# Altium PCB APC_Sensor.PcbDoc
Units mm, origin at the board's own origin, x right, y up, seen from the top; angles counter-clockwise.
Board outline 152.4 x 101.6 mm, 2 copper layers (Top Layer, Bottom Layer); 9 components, 6 nets, 18 pads, 49 vias.
Unrouted connection lines stored in the file: 7.
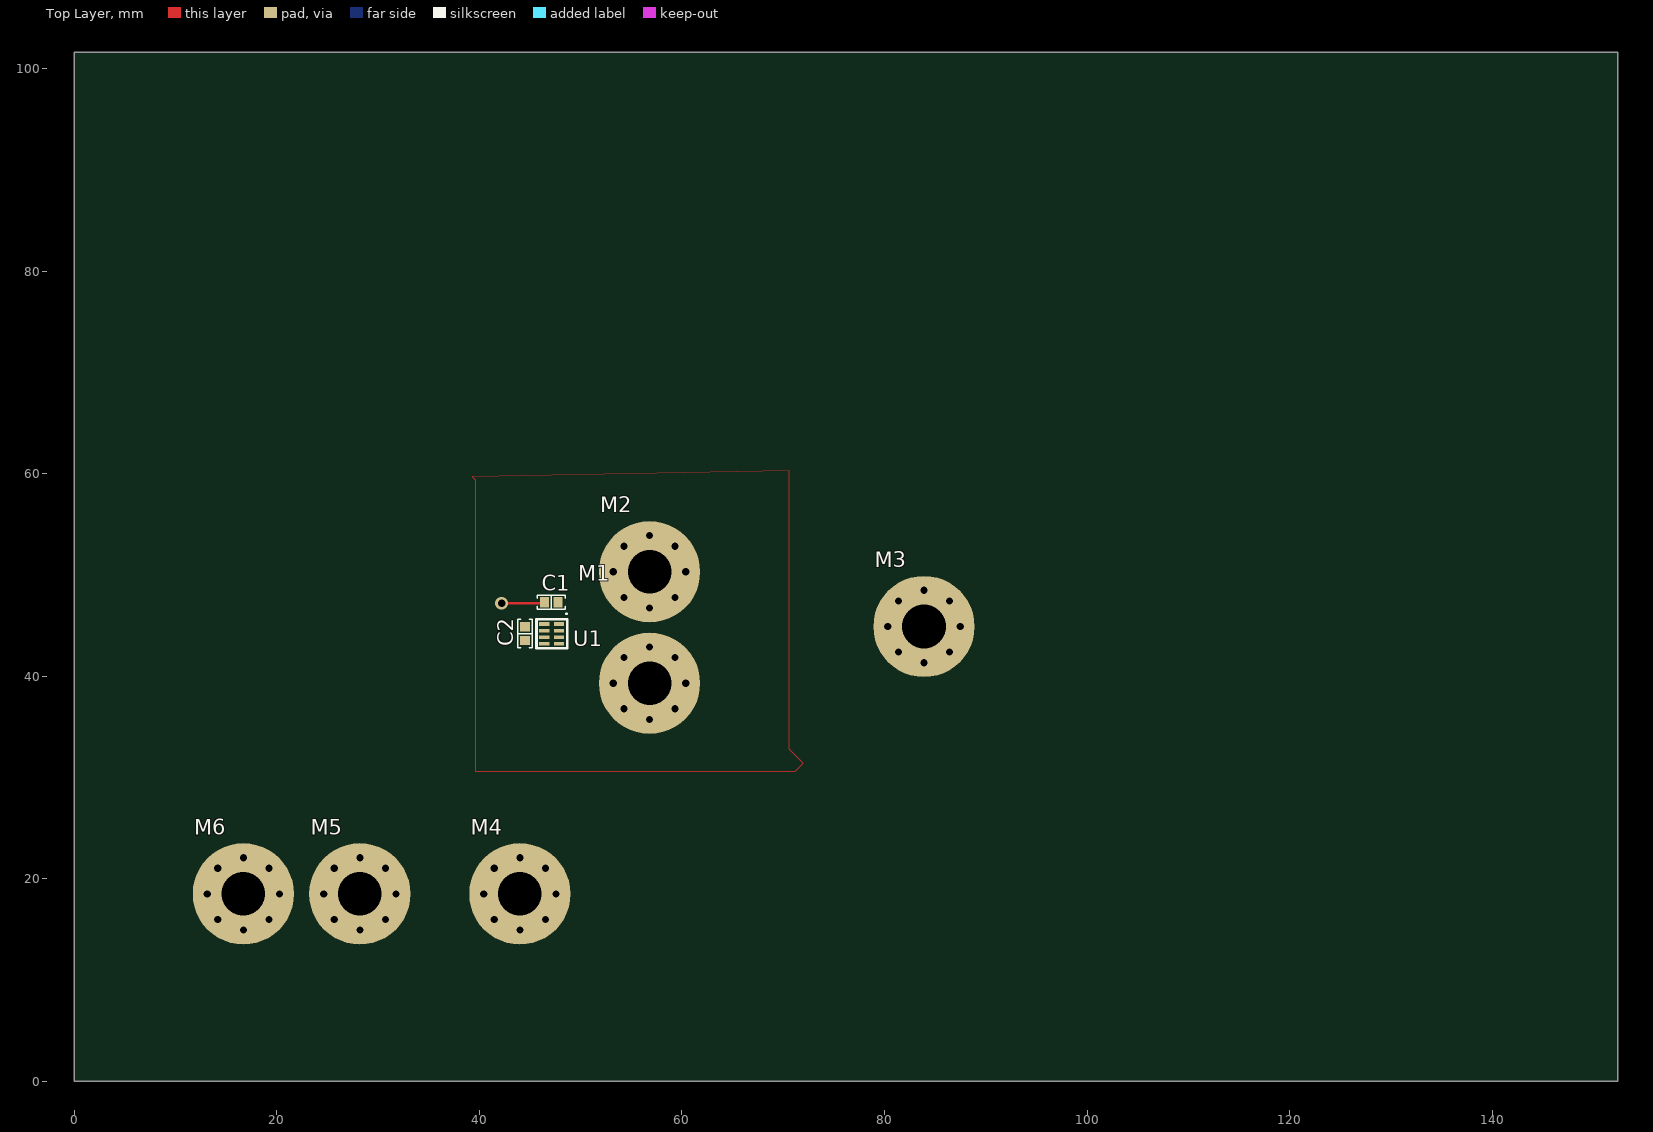
[diagram p0: Top Layer view]
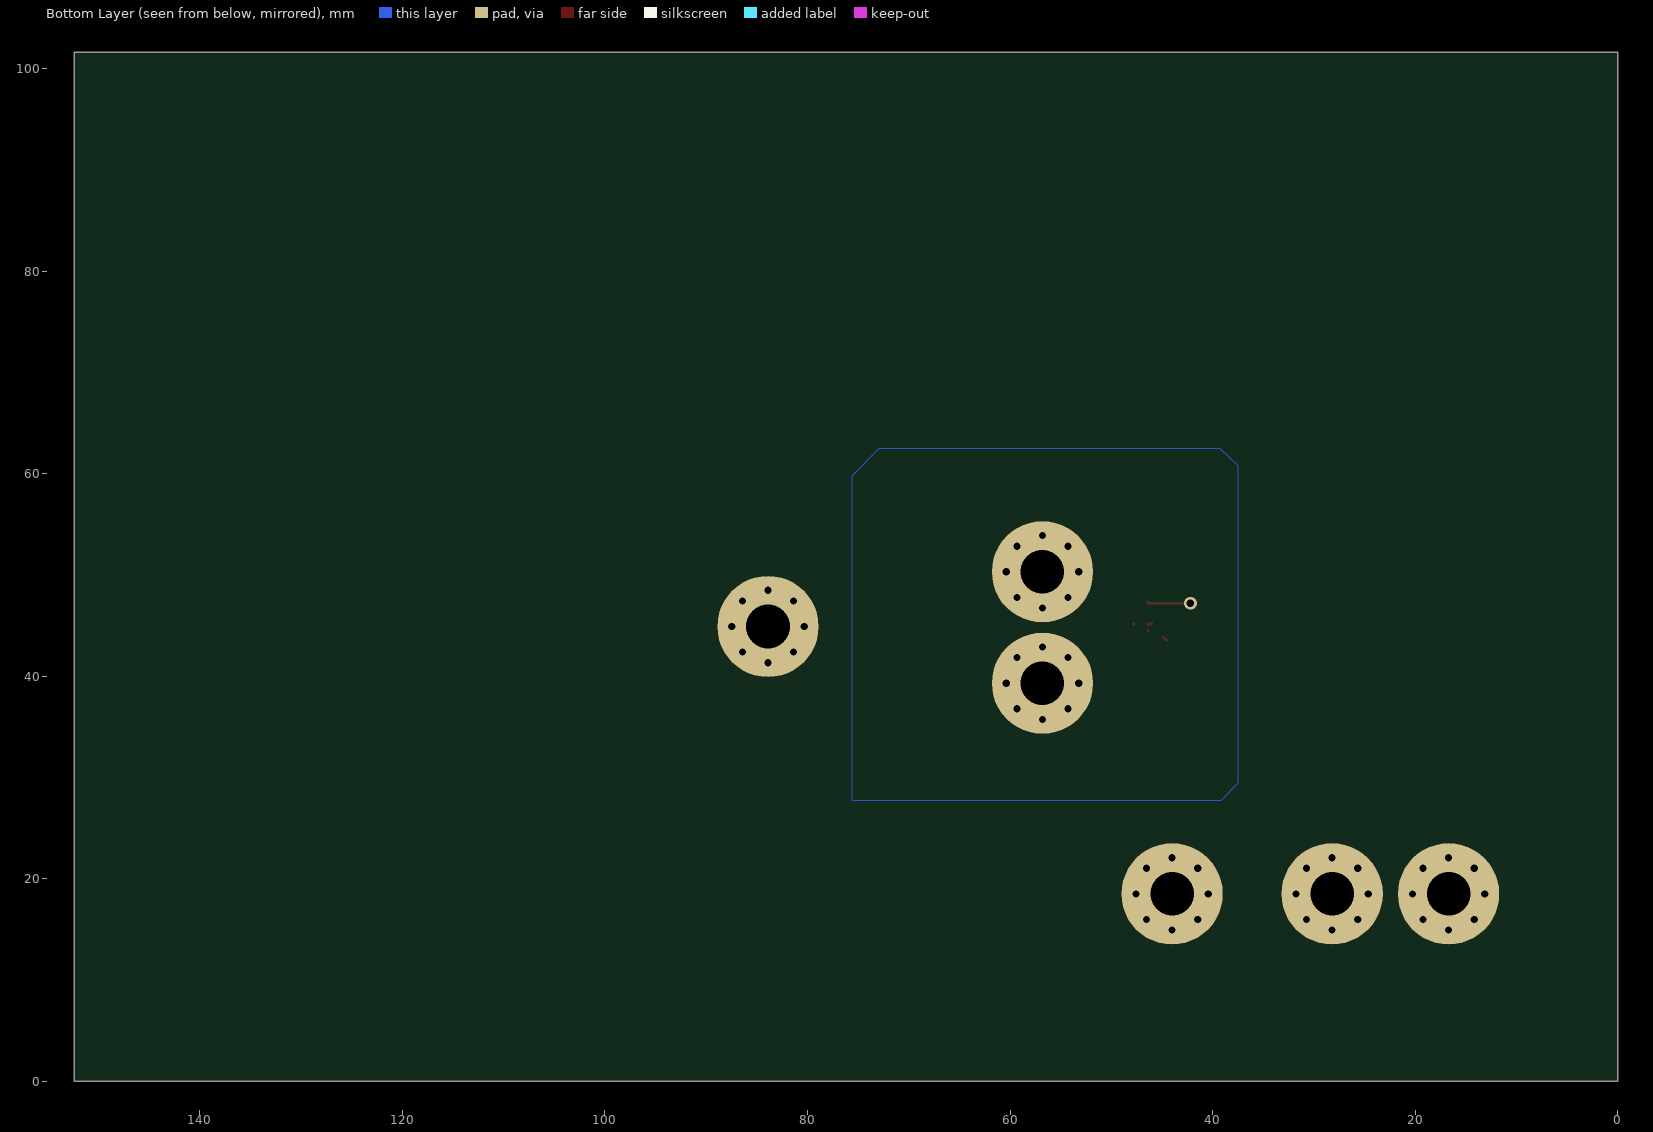
[diagram p1: Bottom Layer view, seen from below]

## Layer stack, top to bottom
Top Solder: solder mask 0.0102, Solder Resist, Dk 3.5
Top Layer: signal copper 0.0356
Dielectric 1: dielectric 0.32, FR-4, Dk 4.8
Bottom Layer: signal copper 0.0356
Bottom Solder: solder mask 0.0102, Solder Resist, Dk 3.5

## Board outline
0,0 152.4,0 152.4,101.6 0,101.6

## Design rules (kind name [scope] priority, off if disabled: settings)
Clearance [All] p1: gap=0.254 ignorepadtopadclearanceinfootprint=FALSE except(0: Arc-Hole Track-Hole SMDPad-Hole THPad-Hole Via-Hole Fill-Hole Poly-Hole Region-Hole Text-Hole)
PolygonConnect Test [All vs IsNamedPolygon('NONET_L01_P000')] p1: connectstyle=Direct reliefconductorwidth=0.254 reliefentries=4 polygonreliefangle="90 Angle" airgapwidth=0.254
PolygonConnect PolygonConnect_4 [All vs IsNamedPolygon('NONET_L01_P000')] p2: connectstyle=Relief reliefconductorwidth=0.254 reliefentries=4 polygonreliefangle="90 Angle" airgapwidth=0.254
PolygonConnect PolygonConnect_3 [All vs IsNamedPolygon('NONET_L01_P000')] p3: connectstyle=Direct reliefconductorwidth=0.254 reliefentries=4 polygonreliefangle="90 Angle" airgapwidth=0.254
PolygonConnect PolygonConnect_2 [All vs IsNamedPolygon('NONET_L01_P000')] p4: connectstyle=Direct reliefconductorwidth=0.254 reliefentries=4 polygonreliefangle="90 Angle" airgapwidth=0.254
PolygonConnect PolygonConnect_1 [All vs IsNamedPolygon('NONET_L01_P000')] p5: connectstyle=Direct reliefconductorwidth=0.254 reliefentries=4 polygonreliefangle="90 Angle" airgapwidth=0.254
PolygonConnect [All] p6: connectstyle=Relief reliefconductorwidth=0.254 reliefentries=4 polygonreliefangle="90 Angle" airgapwidth=0.254
RoutingVias [All] p1: holewidth=0.711 width=1.27 viastyle="Through Hole" minholewidth=0.711 minwidth=1.27 maxholewidth=0.711 maxwidth=1.27
SolderMaskExpansion [All] p1: expansion=0.102 istentingtop=FALSE
Width [All] p1: maxlimit=0.254 minlimit=0.254 preferedwidth=0.254
30 further rules are at their usual default settings.

## Components (designator, comment, footprint, x,y, rotation, side; value= is the part's Value field where it differs from the comment)
C1 "100nF" "CAP 0603/1608" 47.1,47.3 r180 top
C2 "100nF" "CAP 0603/1608" 44.5,44.2 r270 top
M1 "mounting pad" MOUNTING_PAD_M4 56.8,39.3 r0 top
M2 "mounting pad" MOUNTING_PAD_M4 56.8,50.3 r0 top
M3 "mounting pad" MOUNTING_PAD_M4 83.9,44.9 r0 top
M4 "mounting pad" MOUNTING_PAD_M4 44,18.5 r0 top
M5 "mounting pad" MOUNTING_PAD_M4 28.2,18.5 r0 top
M6 "mounting pad" MOUNTING_PAD_M4 16.7,18.5 r0 top
U1 "BMP280" "LGA 8 Fusch" 46.4,45.15 r0 top

## Footprints (in the part's own frame and the unit in brackets; to place one, negate y for a bottom-side part, rotate by r counter-clockwise, add the part's x,y. Pads: shape width x height; smd on the part's side, far side on the other; paste and mask are expansions set on the pad)
"CAP 0603/1608" [mm] "Chip Capacitor, 2-Leads, Body 1.60x0.80mm, IPC Medium Density"
  rect 0.9x1 smd: 1(-0.675,0) 2(0.675,0)
  silkscreen extent -1.4,-0.7 1.4,0.7, body extent -0.8,-0.41 0.8,0.41, height 0.82
"LGA 8 Fusch" [mm]
  rect 1x0.35 smd: 1(1.45,0) 2(1.45,-0.65) 3(1.45,-1.3) 4(1.45,-1.95) 5(0,-1.95) 6(0,-1.3) 7(0,-0.65) 8(0,0)
  silkscreen extent -0.76,-2.41 2.29,1
MOUNTING_PAD_M4 [mm] "M4 mounting pad"
  round 10 hole 4.3: 1(0,0)

## Part data
C1 C2: library part "SMD Capacitor", "Capacitor with multiple Footprints"
U1: "Absolut Pressure Sensor for APC"

## Via types
v1: diameter 1.27, hole 0.711, Top Layer to Bottom Layer, 49 vias

## Nets (pads, with @x,y where several pads share a name; then routed paths per layer and width w, separated by ;. In a path a pad name is that pad's centre, name@x,y a point inside that pad or via, vN(x,y) a via of type N, cw(c..) or ccw(c..) an arc to the next point about the centre after c; other vN are vias at no path point)
+3.6V: C1.2 C2.2 M2.1 U1.6 U1.8 | length 8.8
  Top Layer w0.254: v1(42.2,47.2) 46.325,47.2 C1.2 C1.2@46.425,47.35 ; C2.2 44.55,43.525 C2.2@44.875,43.85 ; U1.8@46.027,45.198 46.075,45.15 U1.8 ; v1(53.225,50.3) M2.1
  other v1: 56.8,46.725 54.272,47.772 59.328,47.772 60.375,50.3 54.272,52.828 59.328,52.828 56.8,53.875
GND: C1.1 C2.1 M1.1 U1.1 U1.7 | length 3.7
  Top Layer w0.254: U1.7@46.352,44.548 U1.7 ; U1.1@47.775,45.198 47.823,45.15 U1.1 ; v1(54.272,41.828) M1.1
  other v1: 56.8,35.725 54.272,36.772 59.328,36.772 53.225,39.3 60.375,39.3 59.328,41.828 56.8,42.875
NetM3_1: M3.1 U1.2
  other v1: 83.9,41.325 81.372,42.372 86.428,42.372 80.325,44.9 87.475,44.9 81.372,47.428 86.428,47.428 83.9,48.475
NetM4_1: M4.1 U1.5
  other v1: 44,14.925 41.472,15.972 46.528,15.972 40.425,18.5 47.575,18.5 41.472,21.028 46.528,21.028 44,22.075
NetM5_1: M5.1 U1.3
  other v1: 28.2,14.925 25.672,15.972 30.728,15.972 24.625,18.5 31.775,18.5 25.672,21.028 30.728,21.028 28.2,22.075
NetM6_1: M6.1 U1.4
  other v1: 16.7,14.925 14.172,15.972 19.228,15.972 13.125,18.5 20.275,18.5 14.172,21.028 19.228,21.028 16.7,22.075

## Polygon pours and split planes (outlines as drawn)
+3.6V on Bottom Layer "NONET_L02_P001" (solid, shelved, pour order 1): 37.5,60.8 37.5,29.4 39.2,27.7 75.6,27.7 75.6,59.8 72.9,62.5 39.3,62.5
GND on Top Layer "NONET_L01_P000" (solid, remove dead copper, shelved, pour order 0): 39.3,59.7 39.6,59.4 39.6,30.6 71.2,30.6 72,31.4 70.6,32.8 70.6,60.3